# Altium PCB TEMPS_280.PcbDoc
Units mm, origin at the board's own origin, x right, y up, seen from the top; angles counter-clockwise.
Board outline 25 x 37 mm, 2 copper layers (Top Layer, Bottom Layer); 14 components, 0 nets, 34 pads, 0 vias.
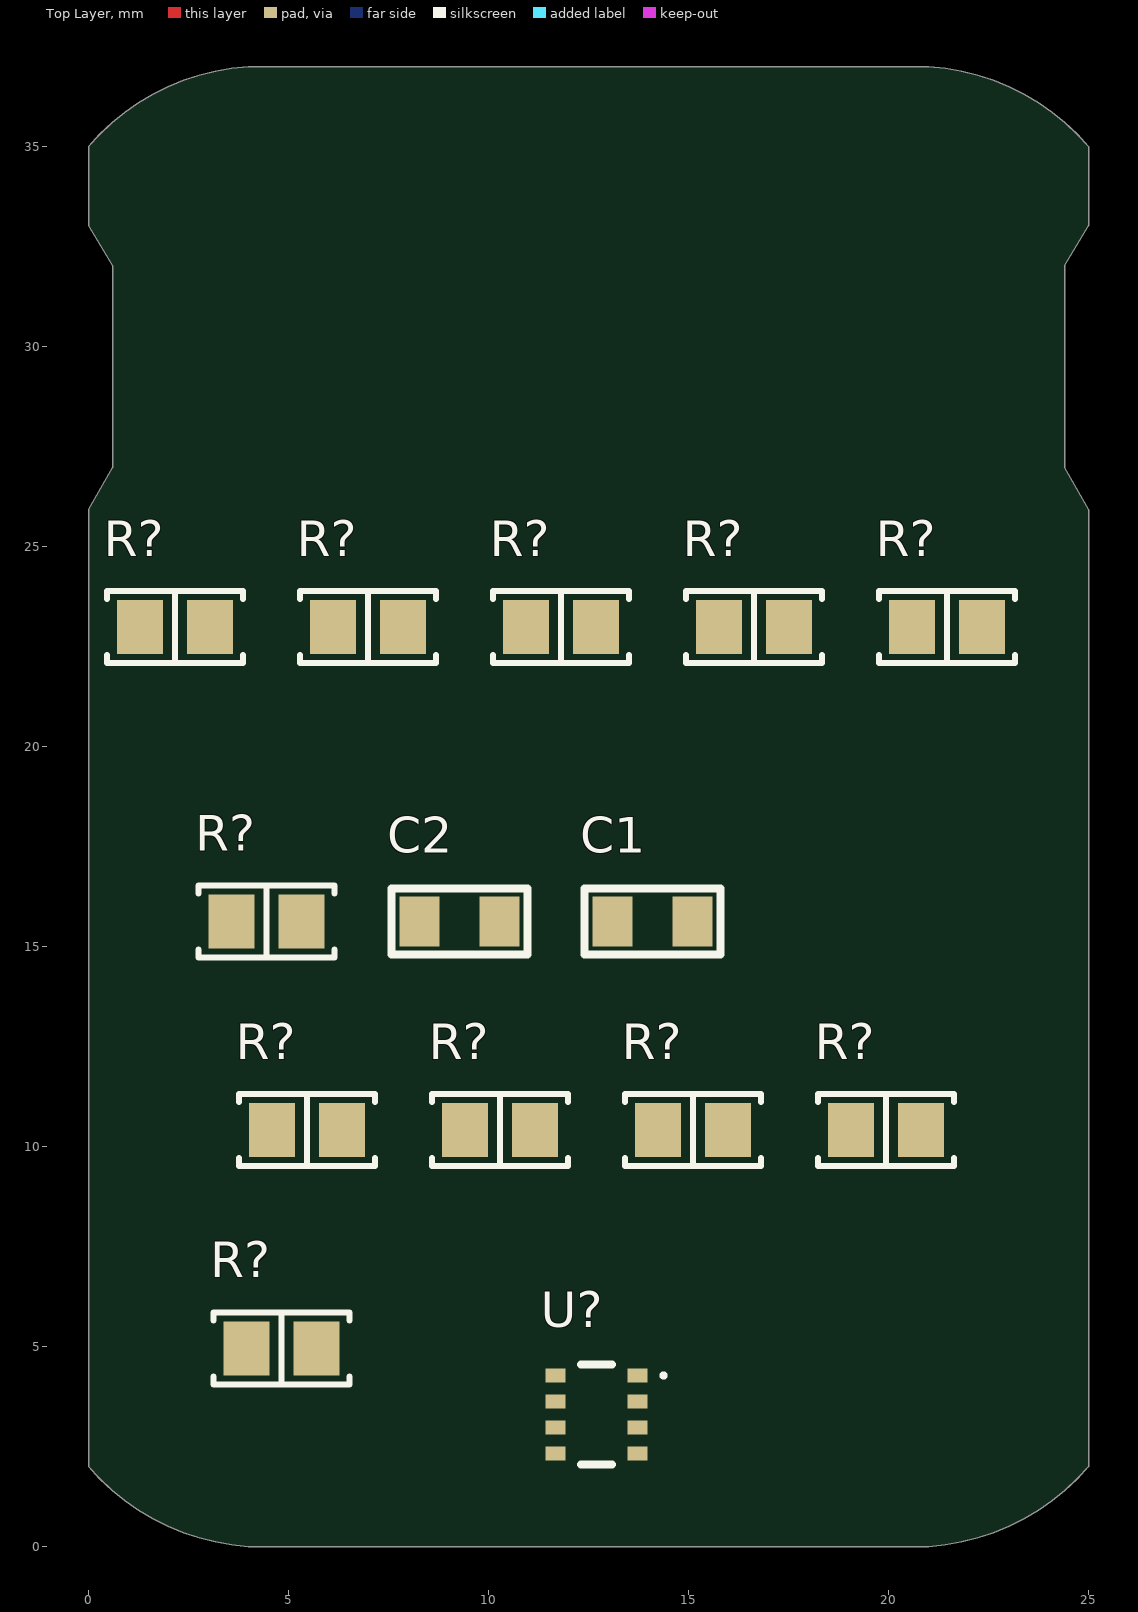
[diagram p0: Top Layer view]
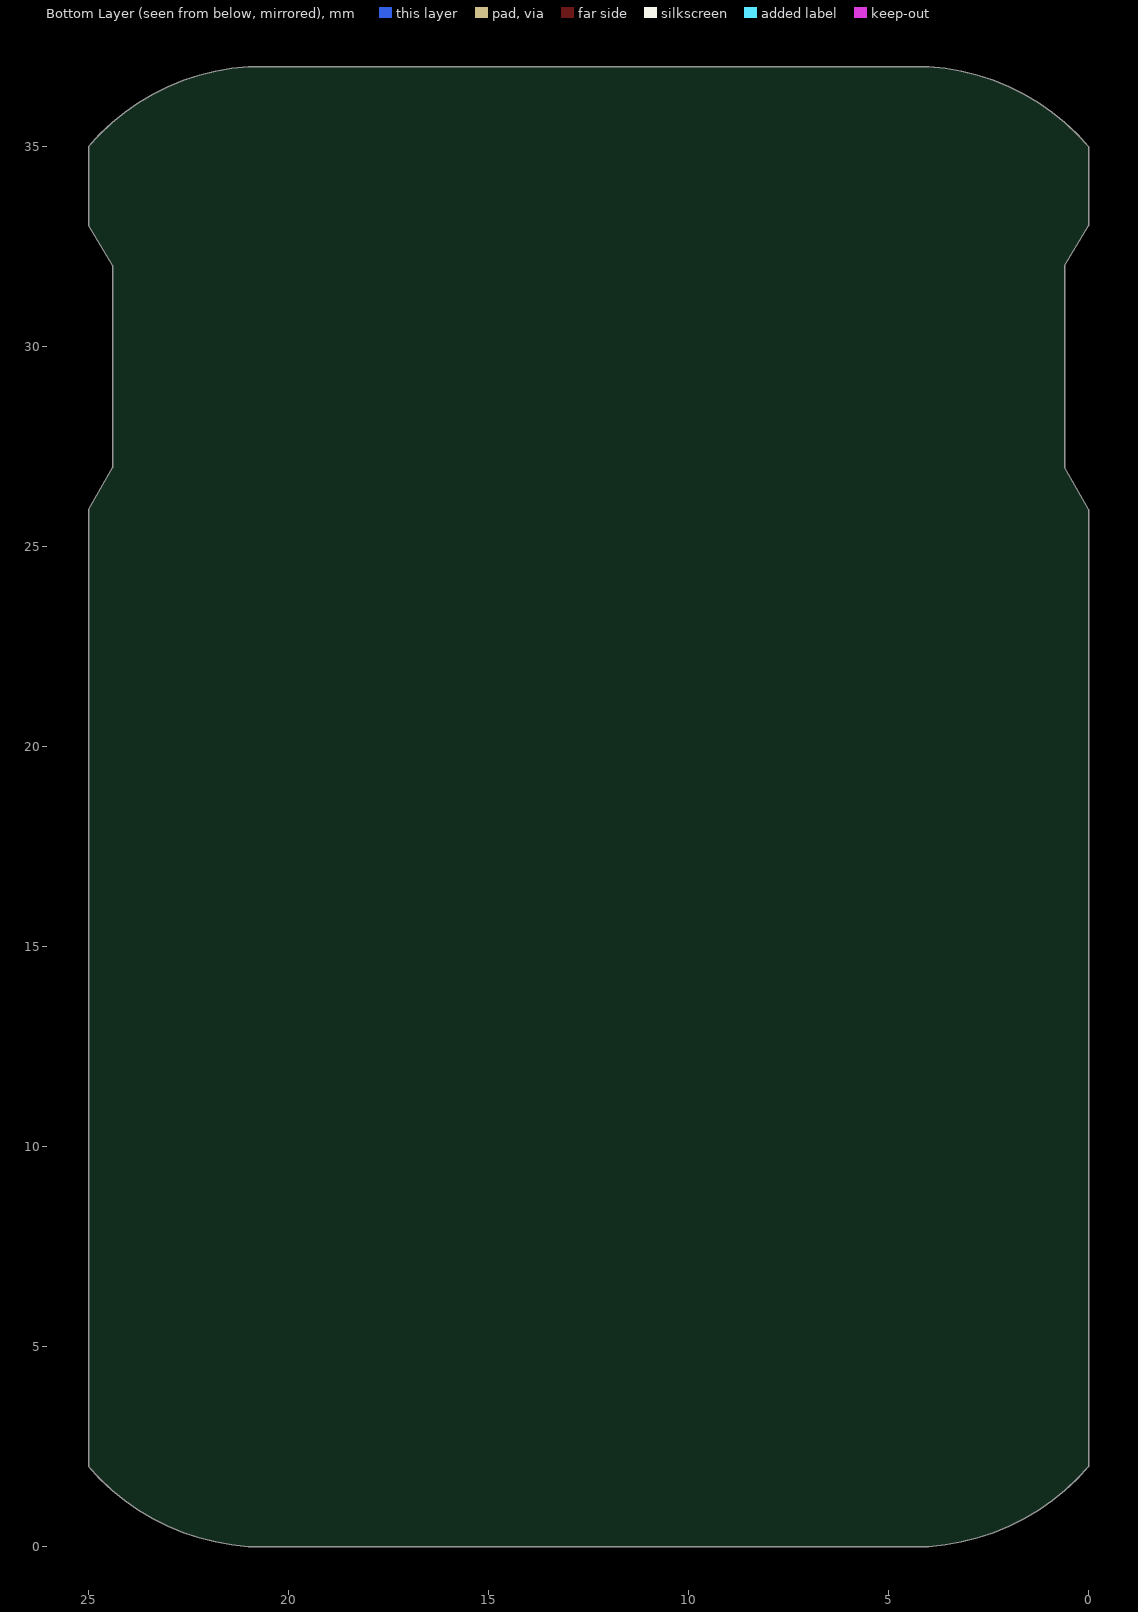
[diagram p1: Bottom Layer view, seen from below]

## Layer stack, top to bottom
Top Solder: solder mask 0.0102, Solder Resist, Dk 3.5
Top Layer: signal copper 0.035
Dielectric 1: dielectric 0.32, FR-4, Dk 4.8
Bottom Layer: signal copper 0.035
Bottom Solder: solder mask 0.0102, Solder Resist, Dk 3.5

## Board outline
4,37 21,37 cw(c20.626,31.252) 25,35 25,33.025 24.4,32.025 24.4,26.975 25,25.925 25,2 cw(c20.626,5.748) 21,0 20.7,0 16.7,0 4,0 cw(c4.374,5.748) 0,2 0,25.925 0.6,26.975 0.6,32.025 0,33.025 0,35 cw(c4.374,31.252)

## Design rules (kind name [scope] priority, off if disabled: settings)
BoardOutlineClearance mdCopperDimension [All] p1: gap=0.254 ignorepadtopadclearanceinfootprint=FALSE except(0: Arc-SplitContinuation Track-SplitContinuation SMDPad-SplitContinuation THPad-SplitContinuation Via-SplitContinuation Fill-SplitContinuation Poly-SplitContinuation Region-SplitContinuation Text-SplitContinuation; 1.016: Poly-OutlineEdge Poly-CavityEdge Poly-CutoutEdge Poly-SplitBarrior)
Clearance "Clearance (Same Net)" [All] p1: gap=0.203 ignorepadtopadclearanceinfootprint=FALSE
Clearance [All] p2: gap=0.203 ignorepadtopadclearanceinfootprint=FALSE
HoleSize [All] p1: absolutevalues=TRUE maxlimit=2540 minlimit=0.61 maxpercent=80.000 minpercent=20.000
HoleToHoleClearance mdDrill [All] p1: gap=0.203 allowstackedmicrovias=TRUE
MinimumSolderMaskSliver [All] p1 off: minsoldermaskwidth=0.254
PasteMaskExpansion mlMinCreamFrame [All] p1: expansion=-0.102
PolygonConnect PolygonConnect_For_PolygonThermal_ON_Width800_Gap100000 [InPolygonClass('PolygonThermal_ON_Width800_Gap100000') vs Not IsVia] p1: connectstyle=Relief reliefconductorwidth=0.002 reliefentries=4 polygonreliefangle="90 Angle" airgapwidth=0.254
PolygonConnect PolygonConnect_For_PolygonThermal_OFF [InPolygonClass('PolygonThermal_OFF')] p2: connectstyle=Direct reliefconductorwidth=0.254 reliefentries=4 polygonreliefangle="90 Angle" airgapwidth=0.254
PolygonConnect ThermalVias [IsVia] p3: connectstyle=Direct reliefconductorwidth=0.254 reliefentries=4 polygonreliefangle="90 Angle" airgapwidth=0.254
PolygonConnect [All] p4: connectstyle=Relief reliefconductorwidth=0.254 reliefentries=4 polygonreliefangle="90 Angle" airgapwidth=0.254
RoutingVias [All] p1: holewidth=0.61 width=1.83 viastyle="Through Hole" minholewidth=0.61 minwidth=1.83 maxholewidth=2.54 maxwidth=2.54
SolderMaskExpansion mlMinStopFrame [All] p1: expansion=0.102 istentingtop=FALSE
Width [All] p1: maxlimit=254 minlimit=0.254 preferedwidth=0.254
26 further rules are at their usual default settings.

## Classes and differential pairs
component class TEMPS_280: C1 C2 R? U?

## Components (designator, comment, footprint, x,y, rotation, side; value= is the part's Value field where it differs from the comment)
C1 "Ceramic capacitor, 0.1μF, X7R, ±10%, 16V, 0805, -55...+125°C" "CAP: 0805" 14.097,15.621 r0 top value=0.1μF
C2 "Ceramic capacitor, 0.1μF, X7R, ±10%, 16V, 0805, -55...+125°C" "CAP: 0805" 9.271,15.621 r0 top value=0.1μF
R? "10 kOhms" "RES 0805_2012" 2.159,22.987 r0 top
R? "5.6 kOhms" "RES 0805_2012" 10.287,10.414 r0 top
R? "27 kOhms" "RES 0805_2012" 4.826,4.953 r0 top
R? "10 kOhms" "RES 0805_2012" 6.985,22.987 r0 top
R? "4.7 kOhms" "RES 0805_2012" 19.939,10.414 r0 top
R? "20 kOhms" "RES 0805_2012" 21.463,22.987 r0 top
R? "4.7 kOhms" "RES 0805_2012" 11.811,22.987 r0 top
R? "470 kOhms" "RES 0805_2012" 5.461,10.414 r0 top
R? "4.7 kOhms" "RES 0805_2012" 16.637,22.987 r0 top
R? "1 MOhms" "RES 0805_2012" 15.113,10.414 r0 top
R? "4.7 kOhms" "RES 0805_2012" 4.445,15.621 r0 top
U? "BME280" BOSC-BME280-8_V 12.7,3.302 r0 top

## Footprints (in the part's own frame and the unit in brackets; to place one, negate y for a bottom-side part, rotate by r counter-clockwise, add the part's x,y. Pads: shape width x height; smd on the part's side, far side on the other; paste and mask are expansions set on the pad)
BOSC-BME280-8_V [mm] "SMD, 8-Leads, Body 2.5x2.5mm, Pitch 0.65mm"
  rect 0.5x0.35 smd: 1(1.025,0.975) 2(1.025,0.325) 3(1.025,-0.325) 4(1.025,-0.975) 5(-1.025,-0.975) 6(-1.025,-0.325) 7(-1.025,0.325) 8(-1.025,0.975)
  silkscreen extent -0.39,-1.25 1.73,1.25, body extent -1.25,-1.25 1.25,1.25, height 1
"CAP: 0805" [mm]
  rect 1x1.25 smd: 1(-1,0) 2(1,0)
  silkscreen extent -1.7,-0.82 1.7,0.82, body extent -1,-0.62 1,0.63, height 0.78
"RES 0805_2012" [mm] "Chip Resistor, 2-Leads, Body 2.00x1.25mm, IPC Medium Density"
  rect 1.15x1.35 smd: 1(-0.875,0) 2(0.875,0)
  silkscreen extent -1.7,-0.9 1.7,0.9, body extent -0.95,-0.62 1.05,0.63, height 0.6

## Part data
C1 C2: library part Ceramic_0805, Manufacturer=Yageo, Package=0805, PartNumber=CC0805KRX7R7BB104, Temperature=-55...+125°C, Tolerance=±10%, TypeCapacitor="Ceramic capacitor", TypeDielectric=X7R, Voltage=16V, HelpURL=https://www.digikey.com/product-detail/en/yageo/CC0805KRX7R7BB104/311-1142-1-ND/303052, ValueManufacturerPartNumber="Ceramic capacitor, 0.1μF, X7R, ±10%, 16V, 0805, -55...+125°C"
R? R?: library part RNCS0805BKE10K0, "RES 10K OHM 0.1% 1/10W 0805", Device Package="0805 (2012 Metric)", Manufacturer="Stackpole Electronics Inc", Operating Temperature="-55°C ~ 155°C", Power (Watts)="0.1W, 1/10W", Ratings=AEC-Q200, Supplier Device Package=0805, Supplier Part Number 1=RNCS0805BKE10K0CT-ND, Temperature Coefficient=±25ppm/°C, Tolerance=±0.1%, ComponentLink1Description=Datasheet, ComponentLink1URL=https://www.seielect.com/catalog/sei-rncs_rnch.pdf, ComponentLink2Description="DigiKey Link", ComponentLink2URL=http://digikey.com/product-detail/en/stackpole-electronics-inc/RNCS0805BKE10K0/RNCS0805BKE10K0CT-ND/1800164, Composition="Thin Film", Features="Anti-Corrosive, Automotive AEC-Q200, Moisture Resistant", Height - Seated (Max)="0.026\" (0.65mm)", LastUpdated="21/01/2020 1.50.08", Lifecycle Status=Active, Minimum Order=1, Number of Terminations=2, Package / Case="0805 (2012 Metric)", Packaging=TapeAndReel, Part Number=RNCS0805BKE10K0, Part Status=Active, PartId=27713, Price=0.09, Resistance="10 kOhms", Series=RNCS, Size / Dimension="0.079\" L x 0.049\" W (2.00mm x 1.25mm)", Supplier 1=DigiKey
R?: library part ERA-6ARW562V, "RES 5.6K OHM 0.05% 1/8W 0805", Device Package="0805 (2012 Metric)", Manufacturer="Panasonic Electronic Components", Operating Temperature="-55°C ~ 155°C", Power (Watts)="0.125W, 1/8W", Ratings=AEC-Q200, Supplier Device Package=0805, Supplier Part Number 1=P5.6KBSCT-ND, Temperature Coefficient=±10ppm/°C, Tolerance=±0.05%, ComponentLink1Description=Datasheet, ComponentLink1URL=https://industrial.panasonic.com/cdbs/www-data/pdf/RDM0000/AOA0000C307.pdf, ComponentLink2Description="DigiKey Link", ComponentLink2URL=http://digikey.com/product-detail/en/panasonic-electronic-components/ERA-6ARW562V/P5.6KBSCT-ND/3073427, Composition="Thin Film", Features="Automotive AEC-Q200", Height - Seated (Max)="0.024\" (0.60mm)", LastUpdated="21/01/2020 1.45.54", Lifecycle Status=Active, Minimum Order=1, Number of Terminations=2, Package / Case="0805 (2012 Metric)", Packaging=TapeAndReel, Part Number=ERA-6ARW562V, Part Status=Active, PartId=37268, Price=0.24, Resistance="5.6 kOhms", Series=ERA-6A, Size / Dimension="0.079\" L x 0.049\" W (2.00mm x 1.25mm)", Supplier 1=DigiKey
R?: library part CRGP0805F27K, "CRGP 0805 27K 1%", Device Package="0805 (2012 Metric)", Manufacturer="TE Connectivity Passive Product", Operating Temperature="-55°C ~ 155°C", Power (Watts)="0.333W, 1/3W", Supplier Device Package=0805, Supplier Part Number 1=A130494CT-ND, Temperature Coefficient=±100ppm/°C, Tolerance=±1%, ComponentLink1Description=Datasheet, ComponentLink1URL=https://www.te.com/commerce/DocumentDelivery/DDEController?Action=srchrtrv&DocNm=9-1773463-9&DocType=DS&DocLang=English, ComponentLink2Description="DigiKey Link", ComponentLink2URL=http://digikey.com/product-detail/en/te-connectivity-passive-product/CRGP0805F27K/A130494CT-ND/8578326, Composition="Thick Film", Features="Pulse Withstanding", Height - Seated (Max)="0.026\" (0.65mm)", LastUpdated="21/01/2020 1.49.38", Lifecycle Status=Active, Minimum Order=1, Number of Terminations=2, Package / Case="0805 (2012 Metric)", Packaging=TapeAndReel, Part Number=CRGP0805F27K, Part Status=Active, PartId=28735, Price=0.02, Resistance="27 kOhms", Series=CRGP, Size / Dimension="0.079\" L x 0.049\" W (2.00mm x 1.25mm)", Supplier 1=DigiKey
R? R? R? R?: library part RCS08054K70JNEA, "RES SMD 4.7K OHM 5% 0.4W 0805", Device Package="0805 (2012 Metric)", Manufacturer="Vishay Dale", Operating Temperature="-55°C ~ 155°C", Power (Watts)="0.4W, 2/5W", Ratings=AEC-Q200, Supplier Device Package=0805, Supplier Part Number 1=541-2866-1-ND, Temperature Coefficient=±200ppm/°C, Tolerance=±5%, ComponentLink1Description=Datasheet, ComponentLink1URL=http://www.vishay.com/docs/20065/rcse3.pdf, ComponentLink2Description="DigiKey Link", ComponentLink2URL=http://digikey.com/product-detail/en/vishay-dale/RCS08054K70JNEA/541-2866-1-ND/5867159, Composition="Thick Film", Features="Automotive AEC-Q200, Pulse Withstanding", Height - Seated (Max)="0.020\" (0.50mm)", LastUpdated="21/01/2020 1.50.02", Lifecycle Status=Active, Minimum Order=1, Number of Terminations=2, Package / Case="0805 (2012 Metric)", Packaging=TapeAndReel, Part Number=RCS08054K70JNEA, Part Status=Active, PartId=27839, Price=0.02, Resistance="4.7 kOhms", Series="AccliMate™ RCU", Size / Dimension="0.079\" L x 0.049\" W (2.00mm x 1.25mm)", Supplier 1=DigiKey
R?: library part RNCF0805TKT20K0, "RES 20K OHM 0.01% 1/8W 0805", Device Package="0805 (2012 Metric)", Manufacturer="Stackpole Electronics Inc", Operating Temperature="-55°C ~ 155°C", Power (Watts)="0.125W, 1/8W", Ratings=AEC-Q200, Supplier Device Package=0805, Supplier Part Number 1=RNCF0805TKT20K0CT-ND, Temperature Coefficient=±10ppm/°C, Tolerance=±0.01%, ComponentLink1Description=Datasheet, ComponentLink1URL=https://www.seielect.com/catalog/sei-rncf.pdf, ComponentLink2Description="DigiKey Link", ComponentLink2URL=http://digikey.com/product-detail/en/stackpole-electronics-inc/RNCF0805TKT20K0/RNCF0805TKT20K0CT-ND/2687088, Composition="Thin Film", Features="Automotive AEC-Q200", Height - Seated (Max)="0.026\" (0.65mm)", LastUpdated="21/01/2020 1.43.57", Lifecycle Status=Active, Minimum Order=1, Number of Terminations=2, Package / Case="0805 (2012 Metric)", Packaging=TapeAndReel, Part Number=RNCF0805TKT20K0, Part Status=Active, PartId=41681, Price=0.56, Resistance="20 kOhms", Series=RNCF, Size / Dimension="0.079\" L x 0.049\" W (2.00mm x 1.25mm)", Supplier 1=DigiKey
R?: library part CRGP0805F470K, "CRGP 0805 470K 1%", Device Package="0805 (2012 Metric)", Manufacturer="TE Connectivity Passive Product", Operating Temperature="-55°C ~ 155°C", Power (Watts)="0.333W, 1/3W", Supplier Device Package=0805, Supplier Part Number 1=A130509CT-ND, Temperature Coefficient=±100ppm/°C, Tolerance=±1%, ComponentLink1Description=Datasheet, ComponentLink1URL=https://www.te.com/commerce/DocumentDelivery/DDEController?Action=srchrtrv&DocNm=9-1773463-9&DocType=DS&DocLang=English, ComponentLink2Description="DigiKey Link", ComponentLink2URL=http://digikey.com/product-detail/en/te-connectivity-passive-product/CRGP0805F470K/A130509CT-ND/8578341, Composition="Thick Film", Features="Pulse Withstanding", Height - Seated (Max)="0.026\" (0.65mm)", LastUpdated="21/01/2020 1.49.38", Lifecycle Status=Active, Minimum Order=1, Number of Terminations=2, Package / Case="0805 (2012 Metric)", Packaging=TapeAndReel, Part Number=CRGP0805F470K, Part Status=Active, PartId=28755, Price=0.02, Resistance="470 kOhms", Series=CRGP, Size / Dimension="0.079\" L x 0.049\" W (2.00mm x 1.25mm)", Supplier 1=DigiKey
R?: library part RCS08051M00FKEA, "RES SMD 1M OHM 1% 0.4W 0805", Device Package="0805 (2012 Metric)", Manufacturer="Vishay Dale", Operating Temperature="-55°C ~ 155°C", Power (Watts)="0.4W, 2/5W", Ratings=AEC-Q200, Supplier Device Package=0805, Supplier Part Number 1=541-2853-1-ND, Temperature Coefficient=±100ppm/°C, Tolerance=±1%, ComponentLink1Description=Datasheet, ComponentLink1URL=http://www.vishay.com/docs/20065/rcse3.pdf, ComponentLink2Description="DigiKey Link", ComponentLink2URL=http://digikey.com/product-detail/en/vishay-dale/RCS08051M00FKEA/541-2853-1-ND/5867146, Composition="Thick Film", Features="Automotive AEC-Q200, Pulse Withstanding", Height - Seated (Max)="0.020\" (0.50mm)", LastUpdated="21/01/2020 1.50.02", Lifecycle Status=Active, Minimum Order=1, Number of Terminations=2, Package / Case="0805 (2012 Metric)", Packaging=TapeAndReel, Part Number=RCS08051M00FKEA, Part Status=Active, PartId=27791, Price=0.03, Resistance="1 MOhms", Series="AccliMate™ RCU", Size / Dimension="0.079\" L x 0.049\" W (2.00mm x 1.25mm)", Supplier 1=DigiKey
U?: library part CMP-2000-05073-1, "Combined Humidity and Pressure Sensor, 1.71 to 3.6 V, -40 to 85 degC, 8-Pin SMD, RoHS, Tape and Reel", Manufacturer="Bosch Sensortec", Datasheet URL=http://datasheet.octopart.com/BME280-Bosch-datasheet-58577763.pdf, Datasheet Version="Rev. 1.2, 10/2015", Manufacturer URL=http://www.bosch-sensortec.com

## Nets (pads, with @x,y where several pads share a name; then routed paths per layer and width w, separated by ;. In a path a pad name is that pad's centre, name@x,y a point inside that pad or via, vN(x,y) a via of type N, cw(c..) or ccw(c..) an arc to the next point about the centre after c; other vN are vias at no path point)
pads on no net: C1.1 C1.2 C2.1 C2.2 R?.1 R?.2 U?.1 U?.2 U?.3 U?.4 U?.5 U?.6 U?.7 U?.8